# Altium PCB PCB1.PcbDoc
Units mm, origin at the board's own origin, x right, y up, seen from the top; angles counter-clockwise.
Board outline 220 x 42 mm, 2 copper layers (Top Layer, Bottom Layer), stack 1.536 mm thick; 44 components, 29 nets, 176 pads, 48 vias.
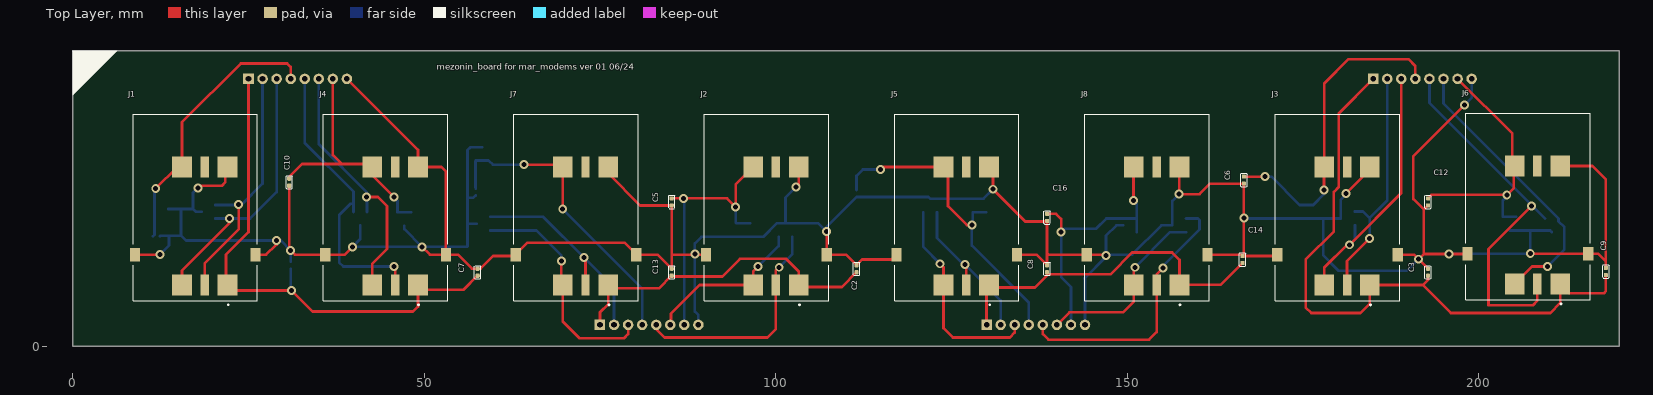
[diagram p0: Top Layer view]
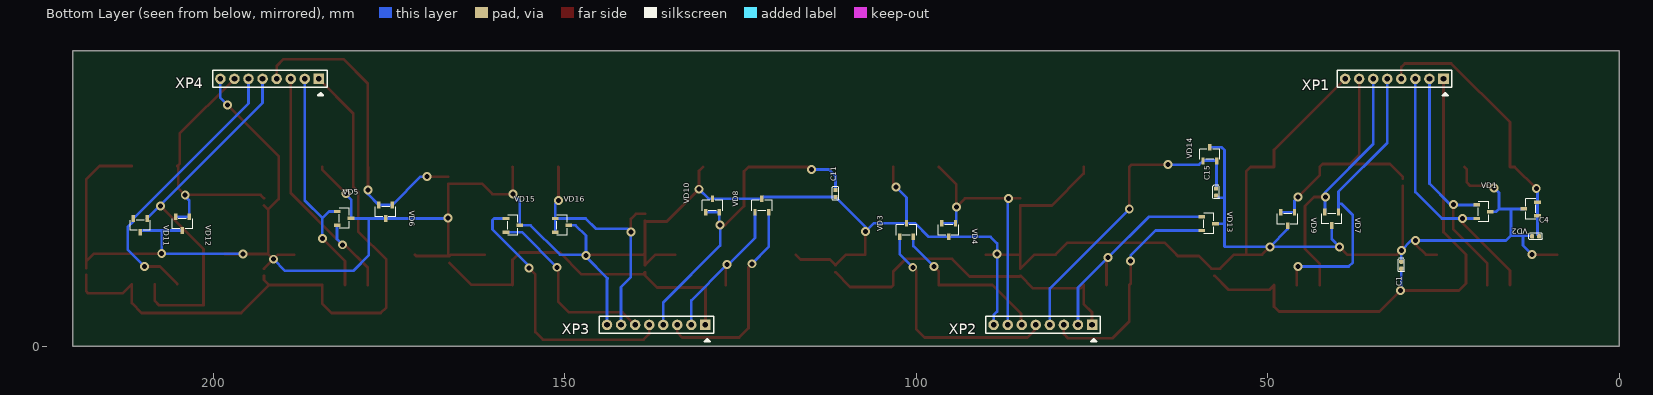
[diagram p1: Bottom Layer view, seen from below]
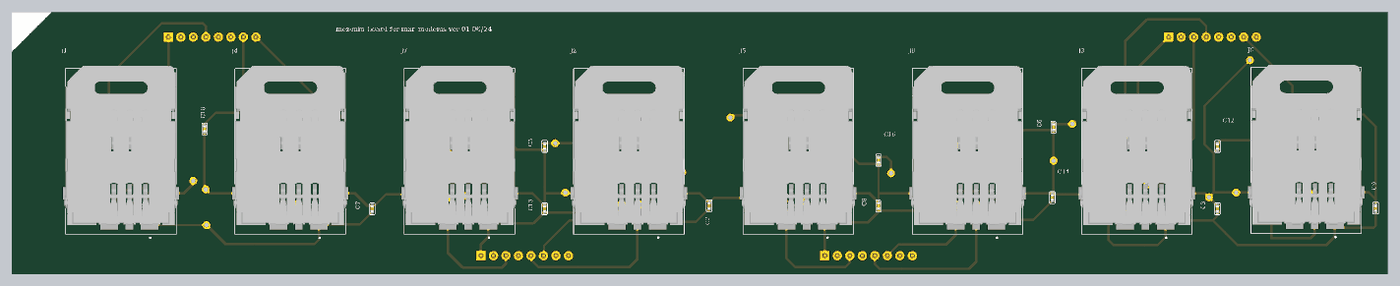
[diagram p2: 3D render of the assembled board from above, using the file's embedded part models]
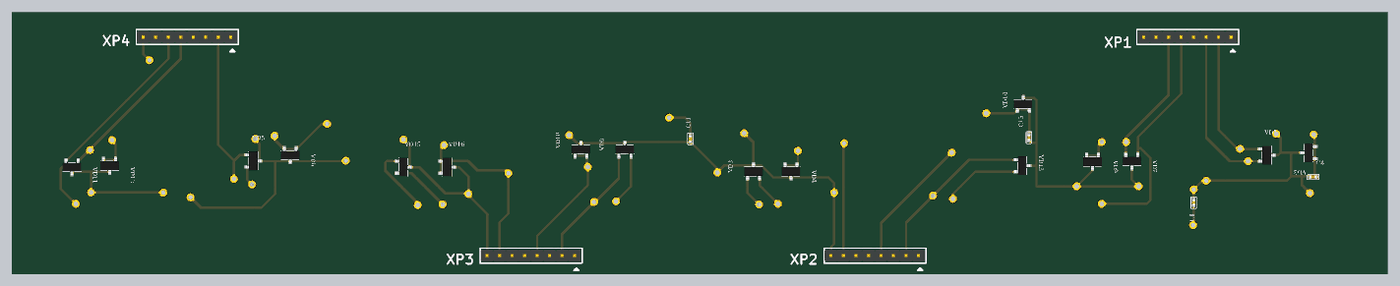
[diagram p3: 3D render of the assembled board from below, using the file's embedded part models]

## Layer stack, top to bottom
Top Solder: solder mask 0.0254, SM-001, Dk 3.5
Top Layer: signal copper 0.018
Dielectric 2: core 1.5, FR4 Tg135, Dk 4.5
Bottom Layer: signal copper 0.018
Bottom Solder: solder mask 0.0254, SM-001, Dk 3.5

## Board outline
0,0 0,42 220,42 220,0

## Design rules (kind name [scope] priority, off if disabled: settings)
Clearance [All] p1: gap=0.254 ignorepadtopadclearanceinfootprint=FALSE
PolygonConnect [All] p1: connectstyle=Relief reliefconductorwidth=0.254 reliefentries=4 polygonreliefangle="90 Angle" airgapwidth=0.254
RoutingVias [All] p1: holewidth=0.711 width=1.27 viastyle="Through Hole" minholewidth=0.711 minwidth=1.27 maxholewidth=0.711 maxwidth=1.27
SolderMaskExpansion [All] p1: expansion=0.102 istentingtop=FALSE
SupplyNets "Schematic Supply Nets" [InNet('GND')] p1: voltage=0.000
Width [All] p1: maxlimit=1 minlimit=0.2 preferedwidth=0.3 minimp=50.000000 maximp=50.000000 favimp=50.000000
30 further rules are at their usual default settings.

## Classes and differential pairs
component class Sheet2: XP1 XP2 XP3 XP4
component class SIM_slots_2: C1 C2 C3 C4 C5 C6 C7 C8 C9 C10 C11 C12 C13 C14 C15 C16 J1 J2 J3 J4 J5 J6 J7 J8 VD1 VD2 VD3 VD4 VD5 VD6 VD7 VD8 VD9 VD10 VD11 VD12 VD13 VD14 VD15 VD16

## Components (designator, comment, footprint, x,y, rotation, side; value= is the part's Value field where it differs from the comment)
C1 "Конденсатор SMD, 0.1мкФ, X7R, 25В, 10%, 0402" C0402 31,11.5 r90 bottom value=0.1u
C2 "Конденсатор SMD, 0.1мкФ, X7R, 25В, 10%, 0402" C0402 111.5,11 r90 top value=0.1u
C3 "Конденсатор SMD, 0.1мкФ, X7R, 25В, 10%, 0402" C0402 192.8,10.5 r90 top value=0.1u
C4 "Конденсатор SMD, 22пФ, X7R, 50В, 10%, 0402" C0402 11.9,15.6 r180 bottom value=22p
C5 "Конденсатор SMD, 22пФ, X7R, 50В, 10%, 0402" C0402 85.2,20.5 r90 top value=22p
C6 "Конденсатор SMD, 22пФ, X7R, 50В, 10%, 0402" C0402 166.6,23.6 r90 top value=22p
C7 "Конденсатор SMD, 0.1мкФ, X7R, 25В, 10%, 0402" C0402 57.6,10.5 r90 top value=0.1u
C8 "Конденсатор SMD, 0.1мкФ, X7R, 25В, 10%, 0402" C0402 138.6,11 r90 top value=0.1u
C9 "Конденсатор SMD, 0.1мкФ, X7R, 25В, 10%, 0402" C0402 218.1,10.6 r90 top value=0.1u
C10 "Конденсатор SMD, 22пФ, X7R, 50В, 10%, 0402" C0402 30.8,23.3 r90 top value=22p
C11 "Конденсатор SMD, 22пФ, X7R, 50В, 10%, 0402" C0402 111.5,21.7 r90 bottom value=22p
C12 "Конденсатор SMD, 22пФ, X7R, 50В, 10%, 0402" C0402 192.8,20.5 r90 top value=22p
C13 "Конденсатор SMD, 0.1мкФ, X7R, 25В, 10%, 0402" C0402 85.2,10.5 r90 top value=0.1u
C14 "Конденсатор SMD, 0.1мкФ, X7R, 25В, 10%, 0402" C0402 166.4,12.3 r90 top value=0.1u
C15 "Конденсатор SMD, 22пФ, X7R, 50В, 10%, 0402" C0402 57.35,21.9 r90 bottom value=22p
C16 "Конденсатор SMD, 22пФ, X7R, 50В, 10%, 0402" C0402 138.6,18.3 r90 top value=22p
J1 "47388-2001" 473882001 17.42,19.87 r90 top
J2 "47388-2001" 473882001 98.669,19.87 r90 top
J3 "47388-2001" 473882001 179.917,19.87 r90 top
J4 "47388-2001" 473882001 44.503,19.87 r90 top
J5 "47388-2001" 473882001 125.751,19.87 r90 top
J6 "47388-2001" 473882001 207,20 r90 top
J7 "47388-2001" 473882001 71.586,19.87 r90 top
J8 "47388-2001" 473882001 152.834,19.87 r90 top
VD1 "Диод защитный, ESDA6V1L" SOT23-3L 19.3,19.1 r180 bottom
VD2 "Диод защитный, ESDA6V1L" SOT23-3L 12.6,19.5 r0 bottom
VD3 "Диод защитный, ESDA6V1L" SOT23-3L 101.4,16.5 r90 bottom
VD4 "Диод защитный, ESDA6V1L" SOT23-3L 95.4,16.5 r270 bottom
VD5 "Диод защитный, ESDA6V1L" SOT23-3L 181.4,18.17 r180 bottom
VD6 "Диод защитный, ESDA6V1L" SOT23-3L 175.5,19.1 r270 bottom
VD7 "Диод защитный, ESDA6V1L" SOT23-3L 40.9,18.1 r270 bottom
VD8 "Диод защитный, ESDA6V1L" SOT23-3L 121.97,20 r90 bottom
VD9 "Диод защитный, ESDA6V1L" SOT23-3L 47.17,18.07 r270 bottom
VD10 "Диод защитный, ESDA6V1L" SOT23-3L 129,20 r90 bottom
VD11 "Диод защитный, ESDA6V1L" SOT23-3L 210.4,17.17 r270 bottom
VD12 "Диод защитный, ESDA6V1L" SOT23-3L 204.4,17.4 r270 bottom
VD13 "Диод защитный, ESDA6V1L" SOT23-3L 58.4,17.4 r180 bottom
VD14 "Диод защитный, ESDA6V1L" SOT23-3L 58.25,27.3 r90 bottom
VD15 "Диод защитный, ESDA6V1L" SOT23-3L 157.4,17.17 r180 bottom
VD16 "Диод защитный, ESDA6V1L" SOT23-3L 150.4,17.17 r180 bottom
XP1 "connect_8_pls" PLS-8 25,38 r0 bottom
XP2 "connect_8_pls" PLS-8 75,3 r0 bottom
XP3 "connect_8_pls" PLS-8 130,3 r0 bottom
XP4 "connect_8_pls" PLS-8 185,38 r0 bottom

## Footprints (in the part's own frame and the unit in brackets; to place one, negate y for a bottom-side part, rotate by r counter-clockwise, add the part's x,y. Pads: shape width x height; smd on the part's side, far side on the other; paste and mask are expansions set on the pad)
473882001 [mm]
  rect 3x2.8 smd: 1(-11.2,-4.6) 3(-11.2,1.88) 4(5.6,-4.6) 6(5.6,1.88)
  rect 3x1.2 smd: 2(-11.2,-1.36) 5(5.6,-1.36)
  rect 1.95x1.45 smd: 7(-6.87,8.58) 8(-6.87,-8.58)
  silkscreen extent -14.11,-8.85 13.11,8.85, body extent -12,-9.05 13.52,9.05, height 1.9
C0402 [mm] "Chip ceramic capacitor 0402"
  rrect50% 0.6x0.6 smd paste-0.025 mask+0.05: 1(-0.5,0) 2(0.5,0)
  silkscreen extent -0.95,-0.45 0.95,0.45, body extent -0.5,-0.25 0.5,0.25, height 0.6
PLS-8 [mm]
  rect 1.5x1.5 hole 0.8: 1(0,0)
  round 1.5 hole 0.8: 2(2,0) 3(4,0) 4(6,0) 5(8,0) 6(10,0) 7(12,0) 8(14,0)
  silkscreen extent -1.2,-1.2 15.11,2.35, body extent -0.98,-1 15.02,1, height 5.98
SOT23-3L [mm] "3-lead 1.45x2.9 package"
  rect 0.95x0.48 smd mask+0.05: 1(-0.97,0.97) 2(-0.97,-0.97) 3(0.97,0)
  silkscreen extent -0.72,-1.45 0.72,1.45, body extent -1.25,-1.5 1.25,1.5, height 1.1

## Part data
C1 C2 C3 C7 C8 C9 C13 C14: library part C0402, "Chip Capacitor 0402", Capacitance=0.1мкФ, Package=0402, TemperatureCoeff=X7R, Tolerance=10%, Voltage=25В, Voltage_assembly=25V, Assembly=0.1u_X7R_25V_10%_0402, Family="Конденсатор SMD"
C4 C5 C6 C10 C11 C12 C15 C16: library part C0402, "Chip Capacitor 0402", Capacitance=22пФ, Package=0402, TemperatureCoeff=X7R, Tolerance=10%, Voltage=50В, Voltage_assembly=50V, Assembly=22p_X7R_50V_10%_0402, Family="Конденсатор SMD"
J1 J2 J3 J4 J5 J6 J7 J8: "Connector", Manufacturer_Name=Molex, Mouser Part Number=538-47388-2001, Arrow Part Number=47388-2001, Arrow Price/Stock=https://www.arrow.com/en/products/47388-2001/molex, Datasheet Link=https://www.molex.com/webdocs/datasheets/pdf/en-us/0473882001_MEMORY_CARD_SOCKET.pdf, Height=1mm, Manufacturer_Part_Number=47388-2001, Mouser Price/Stock=https://www.mouser.co.uk/ProductDetail/Molex/47388-2001?qs=KKUMDL8WE1K2q3cPEOwmLw%3D%3D
VD1 VD2 VD3 VD4 VD5 VD6 VD7 VD8 VD9 VD10 VD11 VD12 VD13 VD14 VD15 VD16: library part ESDA6V1L, "Dual diode array for ESD protection", Manufacturer=STMicroelectronics, Package=SOT23, Assembly=ESDA6V1L, Family="Диод защитный", PartNumber=ESDA6V1L

## Via types
v1: diameter 1.27, hole 0.711, Top Layer to Bottom Layer, 48 vias

## Nets (pads, with @x,y where several pads share a name; then routed paths per layer and width w, separated by ;. In a path a pad name is that pad's centre, name@x,y a point inside that pad or via, vN(x,y) a via of type N, cw(c..) or ccw(c..) an arc to the next point about the centre after c; other vN are vias at no path point)
GND: C1.2 C2.2 C3.2 C4.1 C5.1 C6.1 C7.2 C8.2 C9.2 C10.1 C11.1 C12.1 C13.2 C14.2 C15.1 C16.1 J1.4 J1.7 J1.8 J2.4 J2.7 J2.8 J3.4 J3.7 J3.8 J4.4 J4.7 J4.8 J5.4 J5.7 J5.8 J6.4 J6.7 J6.8 J7.4 J7.7 J7.8 J8.4 J8.7 J8.8 VD1.3 VD2.3 VD3.3 VD4.3 VD5.3 VD6.3 VD7.3 VD8.3 VD9.3 VD10.3 VD11.3 VD12.3 VD13.3 VD14.3 VD15.3 VD16.3 XP1.8 XP2.8 XP3.8 XP4.8 | length 530.1
  Top Layer w0.381: J1.7 v1(12.4,13) ; v1(17.8,22.5) 18.1,22.8 21.2,22.8 21.7,23.3 21.7,25.15 J1.4 ; J1.8 27.5,13 28.9,14.4 29,14.4 v1(29,15) ; C10.1 30.8,13.8 v1(31,13.6) 31.6,13 J4.7 38.7,13 v1(39.8,14.1) ; XP1.8 49.103,27.897 J4.4 52.43,25.47 53.083,24.817 J4.8 ; v1(49.7,14.1) 50.8,13 J4.8 ; J7.4 76.186,24.514 80.7,20 C5.1 85.2,12.98 ; J2.7 85.22,13 85.2,12.98 ; v1(102.9,22.6) 103.269,22.969 J2.4 ; v1(107.2,16.3) 107.249,16.251 J2.8 110,13 C2.2 112.3,12.3 116.471,12.3 J5.7 ; J5.4 130.9,24.921 v1(130.9,22.3) 135.5,17.7 138.5,17.7 C16.1 138.6,13.202 ; J5.8 137.1,13 C8.2 138.6,13.202 ; v1(146.997,12.891) 146.888,13 J8.7 138.802,13 138.6,13.202 ; J8.4 157.4,25.436 v1(157.4,21.6) 160.3,21.6 161.8,23.1 C6.1 v1(166.6,18.2) 166.6,13 C14.2 ; J8.8 166.2,13 C14.2 ; J3.7 171.137,12.8 C14.2 ; v1(181.1,21.7) 184.517,25.117 J3.4 ; J3.8 190.8,13 v1@191.45,12.35 ; v1(191.445,12.345) v1@191.45,12.35 ; v1@191.455,12.345 C3.2 ; C12.1 192.2,19.4 ; v1(198,34.3) 190.7,27 190.7,20.9 192.2,19.4 ; J6.7 198.39,13.1 v1(195.8,13.1) 192.2,13.1 ; v1(207.343,13.13) J6.8 216.97,13.13 218.1,12 ; J6.4 216.2,25.6 218.1,23.7 218.1,12 ; C9.2 218.1,12 ; J4.8 54.8,13 56.8,11 C7.2 58,11 59.8,12.8 62.806,12.8 J7.7 64.706,14.7 78.466,14.7 J7.8 83.2,13 C13.2 85.2,12.98 ; v1@191.45,12.35 192.2,13.1 ; 192.2,13.1 192.2,19.4
  Bottom Layer w0.381: v1(12.4,13) 13.7,14.3 13.7,15.7 ; C4.1 12.5,15.7 13.7,15.7 ; VD2.3 15.4,19.5 ; v1(17.8,22.5) 17.1,21.8 17.1,19.5 ; VD1.3 17.5,19.1 17.1,19.5 ; C1.2 v1(31,13.6) 29.6,15 v1(29,15) 16.1,15 15.4,15.7 ; VD7.3 40.9,15.2 v1(39.8,14.1) v1(49.7,14.1) ; VD9.3 47.17,16.63 v1(49.7,14.1) ; C15.1 57.28,21.4 56.95,21.07 56.219,21.07 56.149,21 ; VD13.3 56.188,17.4 56.149,17.361 ; VD14.3 56.547,28.27 56.149,27.871 56.149,21 ; XP2.8 89,4.4 88.5,4.9 v1(88.5,13.1) 88.5,14.6 89.43,15.53 VD4.3 98.23,15.53 100.17,17.47 VD3.3 ; v1(102.9,22.6) 101.4,21.1 VD3.3 ; v1(130.9,22.3) 129.57,20.97 VD10.3 VD8.3 121.74,21.2 C11.1 107.2,16.9 v1(107.2,16.3) 106.03,17.47 VD3.3 ; XP3.8 144,9.5 143.9,9.6 146.997,12.697 v1(146.997,12.891) ; VD16.3 148.47,17.17 146.997,15.697 v1(146.997,12.891) ; v1(157.4,21.6) 156.43,20.63 VD15.3 154.878,17.17 150.708,13 147.106,13 v1(146.997,12.891) ; v1(166.6,18.2) 166.67,18.13 VD6.3 177.9,18.13 ; v1(181.1,21.7) 181.1,21.521 180.39,20.81 180.39,18.13 177.9,18.13 ; v1(191.445,12.345) 189.8,10.7 180.1,10.7 177.9,12.9 177.9,18.13 ; v1(195.8,13.1) 195.83,13.13 v1(207.343,13.13) 207.343,16.372 207.285,16.43 ; v1(198,34.3) 199,35.3 XP4.8 ; VD12.3 207.285,16.43 ; VD11.3 210.17,16.43 207.285,16.43 ; 13.7,15.7 15.4,15.7 ; 15.4,15.7 15.4,19.5 ; 15.4,19.5 17.1,19.5 ; v1(49.7,14.1) 56.099,14.1 56.149,14.15 56.149,17.361 ; 56.149,17.361 56.149,21
NetC1_1: C1.1 C7.1 J1.1 J4.1 XP1.1 | length 75.5
  Top Layer w0.381: XP1.1 25,16.2 21.8,13 21.8,8.89 J1.1 22.79,7.9 v1(31.1,7.9) 34.1,4.9 48.4,4.9 49.103,5.603 J4.1 49.773,8 55.6,8 C7.1
  Bottom Layer w0.381: C1.1 31,8 v1(31.1,7.9)
NetC2_1: C2.1 C13.1 J2.1 J7.1 XP2.1 | length 47.2
  Top Layer w0.381: XP2.1 75,4.8 76.186,5.986 J7.1 76.656,8.2 83.4,8.2 C13.1 85.3,9.9 92.4,9.9 94.9,12.4 101.5,12.4 103.269,10.631 J2.1 103.539,8.4 109.4,8.4 C2.1
NetC3_1: C3.1 C9.1 J3.1 J6.1 XP4.1 | length 92.2
  Top Layer w0.381: XP4.1 180.1,33.1 180.1,22.6 179.4,21.9 179.4,16.3 175.4,12.3 175.4,5.5 176.2,4.7 183.2,4.7 184.517,6.017 J3.1 192.07,8.67 ; C3.1 192.8,9.4 192.07,8.67 ; C9.1 218.1,7.8 217.8,7.5 212.9,7.5 J6.1 211.6,6.1 210.2,4.7 196.04,4.7 192.07,8.67
NetC8_1: C8.1 C14.1 J5.1 J8.1 XP3.1 | length 49.6
  Top Layer w0.381: XP3.1 130,8.319 136.881,8.319 138.6,10.037 C8.1 138.9,10.2 147.6,10.2 150.7,13.3 156.4,13.3 157.434,12.266 J8.1 157.464,8.7 163.3,8.7 C14.1
NetJ1_2: J1.2 VD1.1 XP1.2 | length 36.3
  Top Layer w0.381: J1.2 18.78,11.78 23.6,16.6 v1(23.6,20.1)
  Bottom Layer w0.381: VD1.1 23.57,20.07 v1(23.6,20.1) 23.63,20.07 23.97,20.07 27,23.1 XP1.2
NetJ1_3: J1.3 VD1.2 XP1.3 | length 38.7
  Top Layer w0.381: J1.3 15.54,10.74 22.3,17.5 v1(22.3,18.13)
  Bottom Layer w0.381: VD1.2 v1(22.3,18.13) 25.23,18.13 29,21.9 XP1.3
NetJ2_2: J2.2 VD3.1 XP2.5 | length 32.7
  Top Layer w0.381: XP2.5 83,2.4 84.2,1.2 98.8,1.2 100.029,2.429 100.029,8.27 100.029,10.729 v1(100.5,11.2)
  Bottom Layer w0.381: v1(100.5,11.2) 102.37,13.07 VD3.1
NetJ2_3: J2.3 VD3.2 XP2.6 | length 23.4
  Top Layer w0.381: XP2.6 85.1,3.1 85.1,4.6 89.17,8.67 J2.3 96.789,10.589 v1(97.5,11.3)
  Bottom Layer w0.381: v1(97.5,11.3) 100.43,14.23 VD3.2
NetJ3_2: J3.2 VD5.1 XP4.2 | length 34.2
  Top Layer w0.381: J3.2 181.277,12.077 v1(184.5,15.3)
  Bottom Layer w0.381: VD5.1 183.56,19.14 184.5,18.2 ; v1(184.5,15.3) 184.5,18.2 ; XP4.2 187,20.7 184.5,18.2
NetJ3_3: J3.3 VD5.2 XP4.3 | length 37.2
  Top Layer w0.381: J3.3 178.037,11.137 181.3,14.4 v1(181.6,14.4) 189,21.8 XP4.3
  Bottom Layer w0.381: v1(181.6,14.4) 182.4,15.2 182.4,17.17 VD5.2
NetJ4_2: J4.2 VD7.1 XP1.5 | length 42
  Top Layer w0.381: v1(45.7,11.3) 45.863,11.137 J4.2
  Bottom Layer w0.381: XP1.5 33,28.9 39.93,21.97 39.93,20.235 ; VD7.1 39.93,20.235 ; v1(45.7,11.3) 38.5,11.3 37.9,11.9 37.9,18.6 39.535,20.235 39.93,20.235
NetJ4_3: J4.3 VD7.2 XP1.6 | length 37.3
  Top Layer w0.381: v1(41.8,21.2) 43.4,21.2 44.7,19.9 44.7,13.8 42.623,11.723 J4.3
  Bottom Layer w0.381: XP1.6 35,28.7 41.87,21.83 VD7.2
NetJ5_2: J5.2 VD8.1 XP3.2 | length 22.9
  Top Layer w0.381: v1(126.9,11.6) 127.111,11.389 J5.2
  Bottom Layer w0.381: VD8.1 122.94,15.36 126.7,11.6 v1(126.9,11.6) 132,6.5 XP3.2
NetJ5_3: J5.3 VD8.2 XP3.3 | length 29.8
  Top Layer w0.381: v1(123.4,11.7) 123.871,11.229 J5.3 123.871,2.529 125.2,1.2 133.3,1.2 134,1.9 XP3.3
  Bottom Layer w0.381: VD8.2 121,14.1 v1(123.4,11.7)
NetJ6_2: J6.2 VD11.1 XP4.5 | length 52.9
  Top Layer w0.381: v1(207.5,19.9) 201.4,13.8 201.4,9.7 201.4,5.8 207.7,5.8 208.36,6.46 J6.2
  Bottom Layer w0.381: XP4.5 193,34.57 VD11.1
NetJ6_3: J6.3 VD11.2 XP4.6 | length 40.5
  Top Layer w0.381: J6.3 207.62,11.3 v1(209.8,11.3)
  Bottom Layer w0.381: XP4.6 195,34.51 VD11.2 211.37,17.73 212.2,16.9 212.2,13.7 v1(209.8,11.3)
NetJ7_2: J7.2 VD13.1 XP2.2 | length 31.1
  Top Layer w0.381: v1(72.7,12.6) 72.946,12.354 J7.2
  Bottom Layer w0.381: VD13.1 66.93,18.37 v1(72.7,12.6) 77,8.3 XP2.2
NetJ7_3: J7.3 VD13.2 XP2.3 | length 32.9
  Top Layer w0.381: v1(69.5,12.1) 69.5,8.876 J7.3 69.706,3.494 72.1,1.1 78.4,1.1 79,1.7 XP2.3
  Bottom Layer w0.381: VD13.2 65.97,16.43 69.5,12.9 v1(69.5,12.1)
NetJ8_2: J8.2 VD15.1 XP3.5 | length 38.7
  Top Layer w0.381: XP3.5 138,1.7 138.8,0.9 153.1,0.9 154.194,1.994 154.194,10.194 v1(155.1,11.1)
  Bottom Layer w0.381: v1(155.1,11.1) 155.1,11.4 160.3,16.6 160.3,17.9 160.06,18.14 VD15.1
NetJ8_3: J8.3 VD15.2 XP3.6 | length 26.6
  Top Layer w0.381: XP3.6 141.784,4.784 149.384,4.784 150.954,6.354 150.954,11.054 v1(151.1,11.2)
  Bottom Layer w0.381: v1(151.1,11.2) 156.1,16.2 VD15.2
SIM2_M1_DATA: C4.2 J1.6 VD2.1 VD2.2 XP1.4 | length 39.2
  Top Layer w0.381: v1(11.8,22.4) 14.87,25.47 J1.6 15.54,31.84 23.9,40.2 30.5,40.2 31,39.7 XP1.4
  Bottom Layer w0.381: C4.2 11.63,15.83 VD2.1 VD2.2 11.63,22.23 v1(11.8,22.4)
SIM2_M2_DATA: C10.2 J4.6 VD9.1 VD9.2 XP1.7 | length 35.5
  Top Layer w0.381: C10.2 30.8,24.1 32.6,25.9 38.281,25.9 ; XP1.7 37,27.181 38.281,25.9 ; v1(45.7,21.2) 42.623,24.277 J4.6 42.193,25.9 38.281,25.9
  Bottom Layer w0.381: v1(45.7,21.2) 46.2,20.7 VD9.1 VD9.2
SIM2_M3_DATA: C15.2 J7.6 VD14.1 VD14.2 XP2.4 | length 43.9
  Top Layer w0.381: v1(64.2,25.8) 69.376,25.8 J7.6 v1@69.706,19.5
  Bottom Layer w0.381: C15.2 57.35,22.47 57.28,22.54 VD14.2 57.35,26.4 59.15,26.4 VD14.1 59.75,25.8 v1(64.2,25.8) ; v1(69.7,19.5) 81,8.2 XP2.4
SIM2_M4_DATA: C5.2 J2.6 VD4.1 VD4.2 XP2.7 | length 38.7
  Top Layer w0.381: C5.2 v1(86.9,21) 93.1,21 v1(94.3,19.8) 94.3,22.981 J2.6
  Bottom Layer w0.381: v1(86.9,21) 87,20.9 XP2.7 ; v1(94.3,19.8) 94.3,17.6 VD4.1 VD4.2
SIM2_M5_DATA: C11.2 J5.6 VD10.1 VD10.2 XP3.4 | length 46.6
  Top Layer w0.381: v1(114.9,25.1) 115.27,25.47 J5.6 124.5,24.841 124.5,19.9 127.2,17.2 v1(127.9,17.2)
  Bottom Layer w0.381: C11.2 111.5,24.2 112.4,25.1 v1(114.9,25.1) ; VD10.1 VD10.2 128.03,17.33 v1(127.9,17.2) 127.9,14.3 136,6.2 XP3.4
SIM2_M6_DATA: C16.2 J8.6 VD16.1 VD16.2 XP3.7 | length 39
  Top Layer w0.381: C16.2 139.9,18.8 140.6,18.1 v1(140.6,16.2) ; v1(150.9,20.7) 150.9,25.416 J8.6
  Bottom Layer w0.381: XP3.7 142,8.4 140.6,9.8 v1(140.6,16.2) 141.1,16.7 145.6,16.7 147.04,18.14 VD16.1 ; v1(150.9,20.7) 151.37,20.23 VD16.1 ; VD16.2 VD16.1
SIM2_M7_DATA: C6.2 J3.6 VD6.1 VD6.2 XP4.4 | length 46.1
  Top Layer w0.381: C6.2 v1(169.6,24.1) ; v1(178,22.2) 178,25.433 J3.6 178.037,37.337 181.5,40.8 190,40.8 191,39.8 XP4.4
  Bottom Layer w0.381: v1(169.6,24.1) 170.5,24.1 VD6.1 VD6.2 178,21.6 v1(178,22.2)
SIM2_M8_DATA: C12.2 J6.6 VD12.1 VD12.2 XP4.7 | length 37
  Top Layer w0.381: C12.2 193.3,21.5 v1(204,21.5) 205,22.5 205,25.48 J6.6 204.8,25.92 204.8,30.2 XP4.7
  Bottom Layer w0.381: v1(204,21.5) 204,21.3 203.43,20.73 VD12.1 VD12.2
pads on no net: J1.5 J2.5 J3.5 J4.5 J5.5 J6.5 J7.5 J8.5

## Silkscreen, mask and mechanical layers (free items; w line width, h text height)
Top Overlay:
  rectangle: -0.1,41.9 4.6,42
  region: 0,42 4.6,42 6.3,42 0,35.7
  text "mezonin_board for mar_modems ver 01 06/24" at 51.801,38.91 h1.52
Mechanical 1:
  the board outline again, w0.254

## Dimensions
25,38 to 75,3 on Mechanical 13
130,3 to 185,38 on Mechanical 13
130,3 to 75,3 on Mechanical 13
25,38 to 75,3 on Mechanical 13
0,42 to 25,38 on Mechanical 13
0,42 to 0,0 on Mechanical 13
0,42 to 220,42 on Mechanical 13